# Altium PCB PCB.PcbDoc
Units mil, origin at the board's own origin, x right, y up, seen from the top; angles counter-clockwise.
Board outline 1968.5 x 2411.42 mil, 2 copper layers (Top Layer, Bottom Layer); 85 components, 64 nets, 316 pads, 99 vias.
Unrouted connection lines stored in the file: 27.
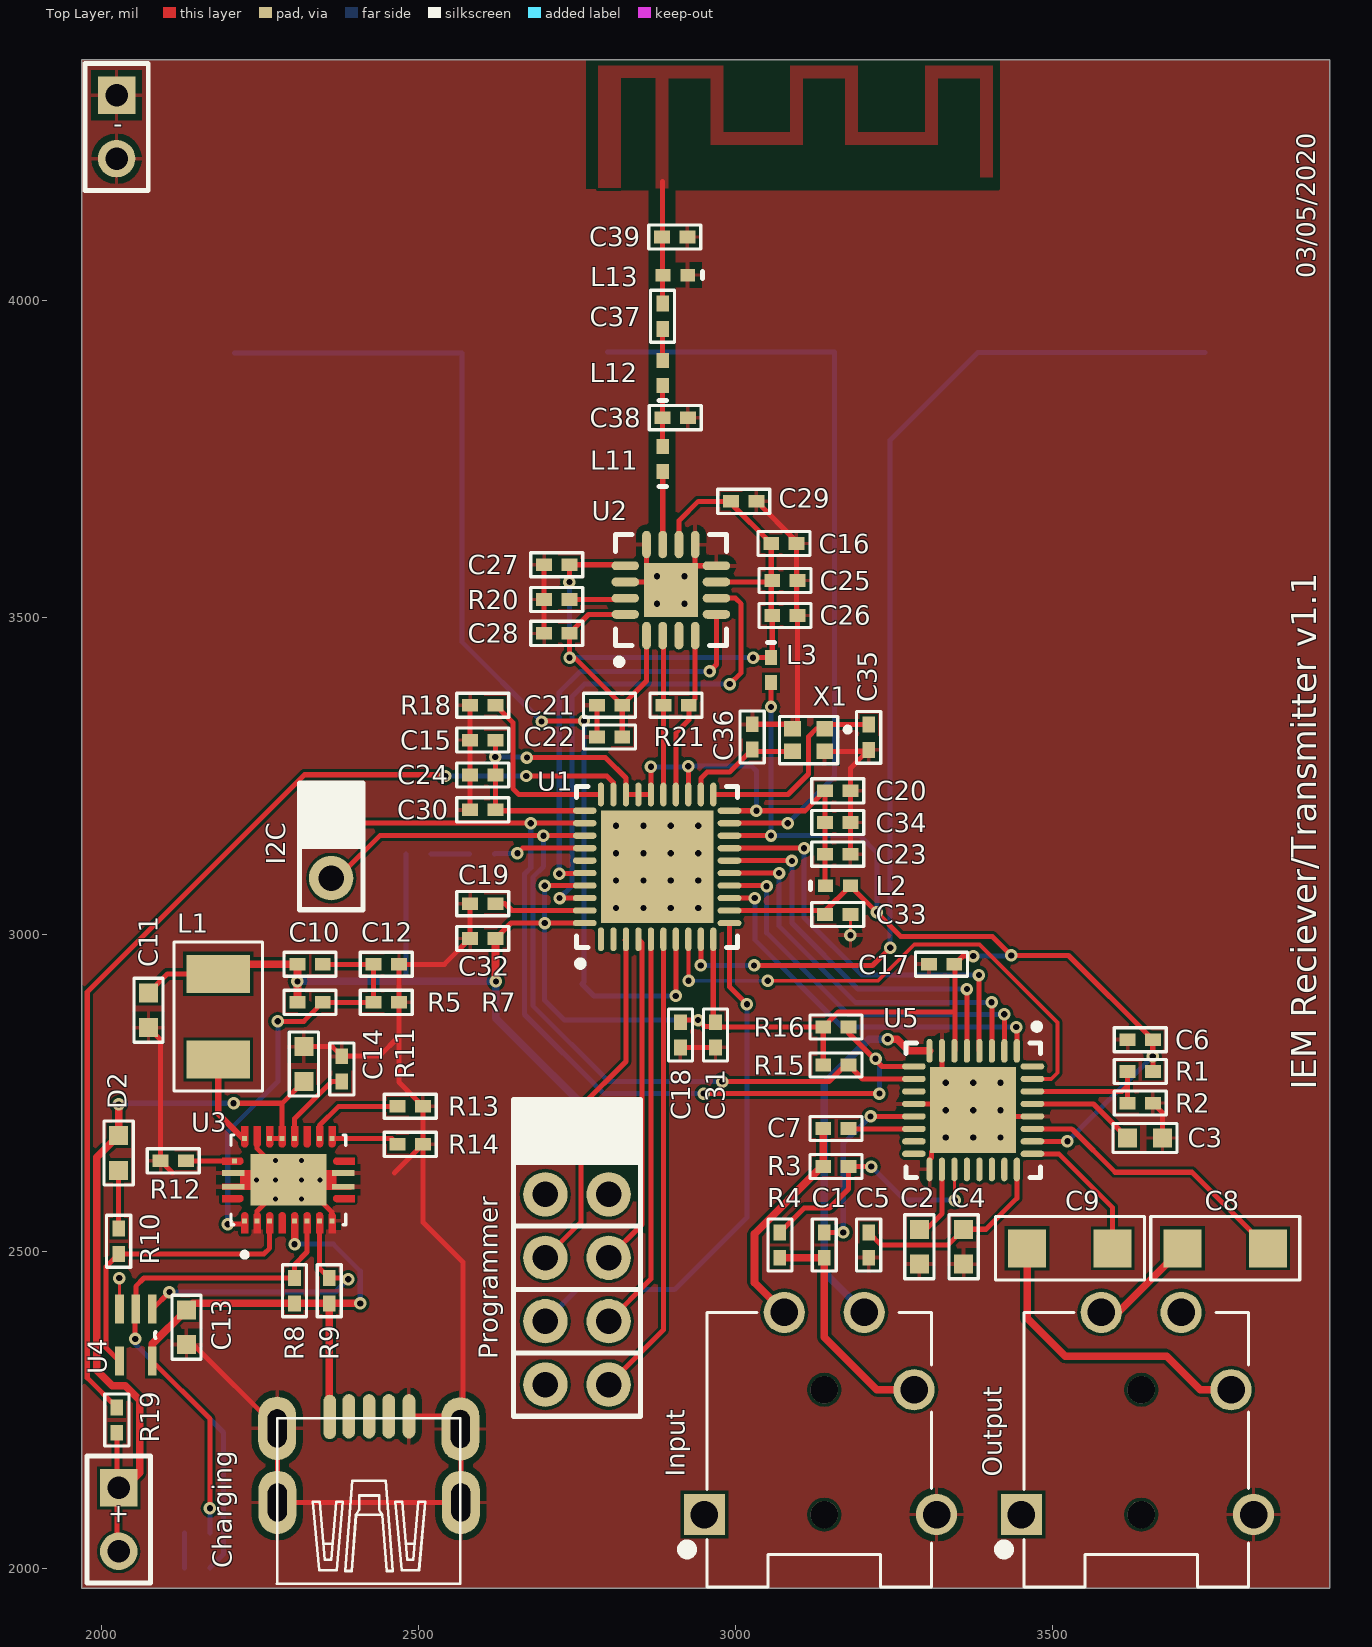
[diagram p0: Top Layer view]
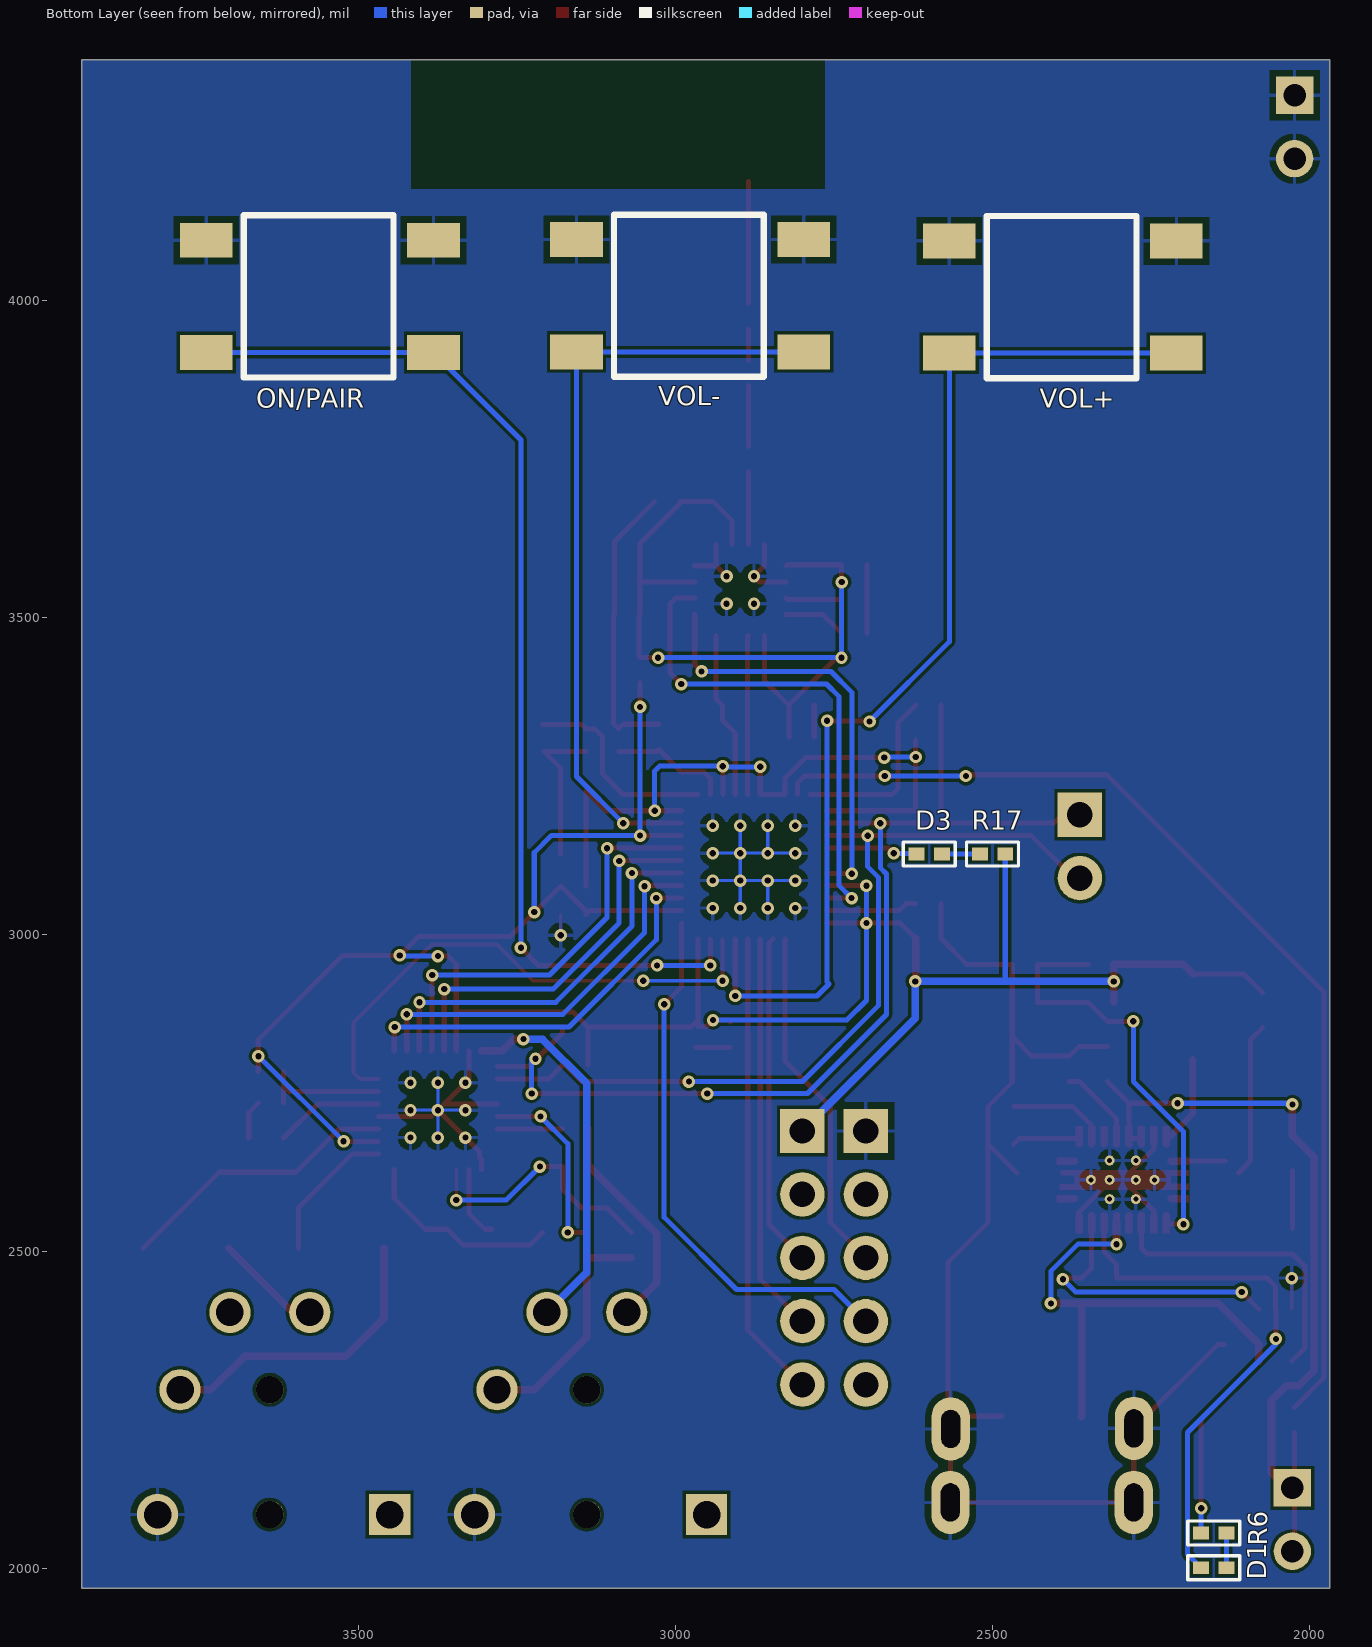
[diagram p1: Bottom Layer view, seen from below]

## Layer stack, top to bottom
Top Solder: solder mask 0.4, Solder Resist, Dk 3.5
Top Layer: signal copper 1.4
Dielectric 1: dielectric 12.6, FR-4, Dk 4.8
Bottom Layer: signal copper 1.4
Bottom Solder: solder mask 0.4, Solder Resist, Dk 3.5

## Board outline
1968.5,1968.5 1968.5,4379.92 3937.01,4379.92 3937.01,1968.5

## Design rules (kind name [scope] priority, off if disabled: settings)
Clearance [All] p1: gap=4.92 ignorepadtopadclearanceinfootprint=FALSE except(0: Arc-Hole Track-Hole SMDPad-Hole THPad-Hole Via-Hole Fill-Hole Poly-Hole Region-Hole Text-Hole)
DiffPairsRouting [All] p1: maxlimit=393.7 minlimit=4.92 mostfreqgap=5.91 toplayer_minwidth=15 toplayer_maxwidth=15 toplayer_prefwidth=15 bottomlayer_minwidth=15 bottomlayer_maxwidth=15 bottomlayer_prefwidth=15 maxuncoupledlength=500
FabricationTestPointUsage FabricationTestPointUsage_1 [All] p1: valid=0 allowmultiple=FALSE
FabricationTestpoint FabricationTestpoint_1 [All] p1: side=3 testpointundercomponent=TRUE minsize=40 maxsize=100 preferedsize=60 minholesize=0 maxholesize=40 preferedholesize=32 testpointgrid=1 allowsidetop=TRUE allowsidebottom=TRUE usegrid=TRUE gridtolerance=0.01
HoleSize [All] p1: absolutevalues=TRUE maxlimit=236.22 minlimit=7.87 maxpercent=80.000 minpercent=20.000
HoleSize FabricationTestpoint [All] p2 off: absolutevalues=TRUE maxlimit=100 minlimit=1 maxpercent=80.000 minpercent=20.000
HoleSize FabricationTestPointUsage [All] p3 off: absolutevalues=TRUE maxlimit=100 minlimit=1 maxpercent=80.000 minpercent=20.000
MinimumSolderMaskSliver [All] p1: minsoldermaskwidth=2.76
MinimumSolderMaskSliver SilkscreenOverComponentPads [All] p2: minsoldermaskwidth=10
PlaneClearance [All] p1: clearance=19.68
PlaneConnect [All] p1: planeconnectstyle=Relief reliefexpansion=15.75 reliefentries=4 reliefconductorwidth=5.91 reliefairgap=5.91
PolygonConnect [All] p1: connectstyle=Relief reliefconductorwidth=5.91 reliefentries=4 polygonreliefangle="90 Angle" airgapwidth=10
RoomDefinition Receiver [InComponentClass('Receiver')] p1: confinementstyle=ConfineIn formatcopy=TRUE lockcomponents=FALSE outline 0,0 2000,0 2000,1000 0,1000
RoomDefinition Power_Supply [InComponentClass('Power_Supply')] p2: confinementstyle=ConfineIn formatcopy=TRUE lockcomponents=FALSE outline 0,0 2000,0 2000,1000 0,1000
RoomDefinition DAC [InComponentClass('DAC')] p3: confinementstyle=ConfineIn formatcopy=TRUE lockcomponents=FALSE outline 0,0 2000,0 2000,1000 0,1000
RoutingCorners [All] p1: cornerstyle=45-Degree minsetback=49.21 maxsetback=49.21
RoutingVias [All] p1: holewidth=11.81 width=23.62 viastyle="Through Hole" minholewidth=7.87 minwidth=17.72 maxholewidth=17.72 maxwidth=29.53
SolderMaskExpansion [All] p1: expansion=1.18
Width [All] p1: maxlimit=393.7 minlimit=4.92 preferedwidth=5.91
22 further rules are at their usual default settings.

## Classes and differential pairs
component class Receiver: C15 C16 C17 C18 C19 C20 C21 C22 C23 C24 C25 C26 C27 C28 C29 C30 C31 C32 C33 C34 C35 C36 C37 C38 C39 D3 I2C L2 L3 L11 L12 L13 ON/PAIR Programmer R15 R16 R17 R18 R19 R20 R21 U1 U2 VOL+ VOL- X1
component class Power_Supply: + - C10 C11 C12 C13 C14 Charging D1 D2 L1 R5 R6 R7 R8 R9 R10 R11 R12 R13 R14 U3 U4
component class DAC: C1 C2 C3 C4 C5 C6 C7 C8 C9 Input R1 R2 R3 R4 U5

## Components (designator, comment, footprint, x,y, rotation, side; value= is the part's Value field where it differs from the comment)
+ "BATTERY+" HDR1X2 2027,2127 r270 top (schematic designator P1)
- "BATTERY-" HDR1X2 2023.62,4323.82 r270 top (schematic designator P3)
C1 "1u" 0402C-TBD 3140,2490 r90 top
C2 "10u" 0603C-GENERIC 3290,2535 r270 top
C3 "10u" 0603C-GENERIC 3618.4,2679 r0 top
C4 "10u" 0603C-GENERIC 3360,2535 r270 top
C5 "1u" 0402C-TBD 3210,2530 r270 top
C6 "2u2" 0402C-TBD 3658.4,2834 r180 top
C7 "1u" 0402C-TBD 3178.4,2694 r180 top
C8 "47u" 1206C-GENERIC 3840,2505 r180 top
C9 "47u" 1206C-GENERIC 3595,2505 r180 top
C10 "33p" 0402C-TBD 2309,2953 r0 top
C11 "10uF" 0603C-GENERIC 2074,2908 r270 top
C12 "220p" 0402C-TBD 2429,2953 r0 top
C13 "10uF" 0603C-GENERIC 2134,2408 r270 top
C14 "10uF" 0603C-GENERIC 2319,2768 r90 top
C15 "2u2" 0402C-TBD 2621.35,3306.65 r180 top
C16 "2u2" 0402C-TBD 3056.35,3616.65 r0 top
C17 "100n" 0402C-TBD 3305,2953 r0 top
C18 "1u" 0402C-TBD 2913.35,2861.65 r270 top
C19 "1u" 0402C-TBD 2581.35,3048.65 r0 top
C20 "100n" 0402C-TBD 3141.35,3226.65 r0 top
C21 "18p" 0402C-TBD 2821.35,3361.65 r180 top
C22 "1n" 0402C-TBD 2821.35,3311.65 r180 top
C23 "100n" 0402C-TBD 3181.35,3126.65 r180 top
C24 "220p" 0402C-TBD 2581.35,3251.65 r0 top
C25 "1n" 0402C-TBD 3058,3558.31 r0 top
C26 "18p" 0402C-TBD 3058,3503.31 r0 top
C27 "1n" 0402C-TBD 2738,3583.31 r180 top
C28 "18p" 0402C-TBD 2738,3475 r180 top
C29 "1n" 0402C-TBD 2993,3683.31 r0 top
C30 "100n" 0402C-TBD 2621.35,3196.65 r180 top
C31 "100n" 0402C-TBD 2968.35,2861.65 r270 top
C32 "100n" 0402C-TBD 2621.35,2993.65 r180 top
C33 "100n" 0402C-TBD 3141.35,3031.65 r0 top
C34 "100n" 0402C-TBD 3141.35,3176.65 r0 top
C35 "33p" 0402C-TBD 3210,3331 r270 top
C36 "33p" 0402C-TBD 3026.35,3291.65 r90 top
C37 "1n" 0402C-TBD 2885,3955.31 r90 top
C38 "1n" 0402C-TBD 2885,3815.31 r0 top
C39 "1n" 0402C-TBD 2884.21,4100.39 r0 top
Charging "USB" USB-MINI-B-51387-0571 2360,2239 r90 top (schematic designator K1)
D1 "LED2" 0402C-GENERIC 2131,2001 r0 bottom
D2 "DIODE-GENERIC" 0603C-GENERIC 2027,2683 r270 top
D3 "LED2" 0402C-GENERIC 2580,3127 r0 bottom
I2C "I2C" HEADER-1X2 2362.2,3188.98 r0 top (schematic designator P2)
Input "SJ1-43515TS" CUI_SJ-43515TS 3140,2187.36 r90 top (schematic designator J1)
L1 "Inductor" 1210C-GENERIC 2184,2803 r90 top value=6n8
L2 "Inductor" 0402-A 3161.35,3076.65 r0 top value=102
L3 "Inductor" 0402-A 3056,3417 r270 top value=102
L11 "Inductor" 0402-A 2885,3750.31 r90 top value=6n8
L12 "Inductor" 0402-A 2885,3885.62 r90 top value=6n8
L13 "Inductor" 0402-A 2905,4040.31 r180 top value=6n8
ON/PAIR "FSM2JSMAATR" "Tactile Button" 3740.27,4095.17 r270 bottom
Output "SJ1-43515TS" CUI_SJ-43515TS 3640,2187.36 r90 top (schematic designator J2)
Programmer "Programm" HEADER-2X5 2700,2690 r0 top (schematic designator P4)
R1 "DNM" 0402R-GENERIC 3618.4,2784 r0 top
R2 "0R" 0402R-GENERIC 3658.4,2734 r180 top
R3 "2k2" 0402R-GENERIC 3178.4,2634 r180 top
R4 "2k2" 0402R-GENERIC 3070,2530 r270 top
R5 "330K" 0402R-GENERIC 2309,2893 r0 top
R6 "270R" 0402R-GENERIC 2171,2056 r180 bottom
R7 "100K" 0402R-GENERIC 2429,2893 r0 top
R8 "10k" 0402R-GENERIC 2304.2,2418.04 r90 top
R9 "10k" 0402R-GENERIC 2359.2,2418.04 r90 top
R10 "10k" 0402R-GENERIC 2027,2496 r90 top
R11 "10k" 0402R-GENERIC 2379,2768 r90 top
R12 "0R" 0402R-GENERIC 2133,2643 r180 top
R13 "0R" 0402R-GENERIC 2467,2729 r0 top
R14 "2k2" 0402R-GENERIC 2467,2669 r0 top
R15 "2k2" 0402R-GENERIC 3138.4,2794 r0 top
R16 "2k2" 0402R-GENERIC 3138.4,2854 r0 top
R17 "270R" 0402R-GENERIC 2480,3127 r0 bottom
R18 "56k" 0402R-GENERIC 2581.35,3361.65 r0 top
R19 "47k" 0402R-GENERIC 2024,2254 r270 top
R20 "4k3" 0402R-GENERIC 2738,3528.31 r180 top
R21 "??" 0402R-GENERIC 2926.35,3361.65 r180 top
U1 "CC85xx" QFN40 2876.35,3106.65 r90 top
U2 "CC2590" QFN16 2898,3543.31 r90 top
U3 "BQ25015" *CONV_BQ25015RHLT_BQ25015RHLT(Primary) 2294.67,2613 r90 top
U4 "SN74AHC1G32DCKR" *SOT65P210X110-5N 2054,2368 r270 top
U5 "TLV320AIC3204" QFN32 3374.9,2722.9 r270 top
VOL+ "FSM2JSMAATR" "Tactile Button" 2568.27,4094.16 r270 bottom (schematic designator VOL-)
VOL- "FSM2JSMAATR" "Tactile Button" 3156.27,4096.16 r270 bottom (schematic designator VOL+)
X1 "Component_1" *XTALDFN200X160X70-4N 3115.35,3306.65 r180 top

## Footprints (in the part's own frame and the unit in brackets; to place one, negate y for a bottom-side part, rotate by r counter-clockwise, add the part's x,y. Pads: shape width x height; smd on the part's side, far side on the other; paste and mask are expansions set on the pad)
0402-A [mm] "Chip Inductor, Body 1.0x0.5mm, IPC High Density"
  rect 0.6x0.5 smd: 1(-0.5,0) 2(0.5,0)
  silkscreen extent -1.1,-0.15 -1.1,0.15, body extent -0.55,-0.3 0.55,0.3, height 0.55
0402C-GENERIC [mil]
  rect 25x20 smd: 1(0,0) 2(40,0)
  silkscreen extent -21,-19 61,19
0402C-TBD [mil]
  rect 25x20 smd: 1(0,0) 2(40,0)
  silkscreen extent -21,-19 61,19, body extent 2,-9 39,9, height 19
0402R-GENERIC [mil]
  rect 25x20 smd: 1(0,0) 2(40,0)
  silkscreen extent -21,-19 61,19, body extent -6,-10 46,10, height 14
0603C-GENERIC [mil] "CAPACITOR 0603"
  rect 30x30 smd: 1(0,0) 2(55,0)
  silkscreen extent -23,-23 78,23, body extent -4,-15 59,15, height 19
1206C-GENERIC [mil]
  rect 60x60 smd: 1(0,0) 2(135,0)
  silkscreen extent -50,-50 185,50, body extent -8,-29 147,29, height 46
1210C-GENERIC [mil]
  rect 60x100 smd: 1(0,0) 2(135,0)
  silkscreen extent -50,-70 185,70, body extent -10,-50 145,50, height 46
*CONV_BQ25015RHLT_BQ25015RHLT(Primary) [mm]
  rect 0.2x0.2 smd: 2(-1.65,1.75) 3(-1.65,1.25) 4(-1.65,0.75) 6(-1.65,-0.25) 7(-1.65,-0.75) 8(-1.65,-1.25) 9(-1.65,-1.75) 12(1.65,-1.75) 13(1.65,-1.25) 15(1.65,-0.25) 16(1.65,0.25) 17(1.65,0.75) 19(1.65,1.75) 20(0.75,2.15)
  rect 2.05x3.05 smd: 21(0,0)
  rect 0.23x0.9 smd: 21_1(-0.275,2.2) 21_2(0.275,2.2) 21_3(0.275,-2.2) 21_4(-0.275,-2.2)
  round 0.4 hole 0.2: 21_5(0,1.275) 21_6(-0.775,0.525) 21_7(0,0.525) 21_8(0.775,0.525) 21_9(0,-1.275) 21_10(0.775,-0.525) 21_11(0,-0.525) 21_12(-0.775,-0.525)
  Top Layer region: -0.39,2.65 -0.16,2.65 -0.16,1.925 0.16,1.925 0.16,2.65 0.39,2.65 0.39,-2.49 0.175,-2.49 0.175,-1.925 -0.17,-1.925 -0.17,-2.515 -0.39,-2.515
  Top Layer region: 0.89,-2.65 0.89,-1.94 0.89,-1.933 0.889,-1.925 0.888,-1.918 0.887,-1.911 0.885,-1.904 0.883,-1.897 0.881,-1.89 0.878,-1.883 0.875,-1.876 0.871,-1.87 0.867,-1.864 0.863,-1.858 0.859,-1.852 0.854,-1.846 0.849,-1.841 0.844,-1.836 0.838,-1.831 0.832,-1.827 0.826,-1.823 0.82,-1.819 0.814,-1.815 0.807,-1.812 0.8,-1.809 0.793,-1.807 0.786,-1.805 0.779,-1.803 0.772,-1.802 0.765,-1.801 0.757,-1.8 0.75,-1.8 0.743,-1.8 0.735,-1.801 0.728,-1.802 0.721,-1.803 0.714,-1.805 0.707,-1.807 0.7,-1.809 0.693,-1.812 0.686,-1.815 0.68,-1.819 0.674,-1.823 0.668,-1.827 0.662,-1.831 0.656,-1.836 0.651,-1.841 0.646,-1.846 0.641,-1.852 0.637,-1.858 0.633,-1.864 0.629,-1.87 0.625,-1.876 0.622,-1.883 0.619,-1.89 0.617,-1.897 0.615,-1.904 0.613,-1.911 0.612,-1.918 0.611,-1.925 0.61,-1.933 0.61,-1.94 0.61,-2.65
  Top Layer region: -0.61,-2.65 -0.61,-1.94 -0.61,-1.933 -0.611,-1.925 -0.612,-1.918 -0.613,-1.911 -0.615,-1.904 -0.617,-1.897 -0.619,-1.89 -0.622,-1.883 -0.625,-1.876 -0.629,-1.87 -0.633,-1.864 -0.637,-1.858 -0.641,-1.852 -0.646,-1.846 -0.651,-1.841 -0.656,-1.836 -0.662,-1.831 -0.668,-1.827 -0.674,-1.823 -0.68,-1.819 -0.686,-1.815 -0.693,-1.812 -0.7,-1.809 -0.707,-1.807 -0.714,-1.805 -0.721,-1.803 -0.728,-1.802 -0.735,-1.801 -0.743,-1.8 -0.75,-1.8 -0.757,-1.8 -0.765,-1.801 -0.772,-1.802 -0.779,-1.803 -0.786,-1.805 -0.793,-1.807 -0.8,-1.809 -0.807,-1.812 -0.814,-1.815 -0.82,-1.819 -0.826,-1.823 -0.832,-1.827 -0.838,-1.831 -0.844,-1.836 -0.849,-1.841 -0.854,-1.846 -0.859,-1.852 -0.863,-1.858 -0.867,-1.864 -0.871,-1.87 -0.875,-1.876 -0.878,-1.883 -0.881,-1.89 -0.883,-1.897 -0.885,-1.904 -0.887,-1.911 -0.888,-1.918 -0.889,-1.925 -0.89,-1.933 -0.89,-1.94 -0.89,-2.65
  Top Layer region: -0.89,2.65 -0.89,1.94 -0.89,1.933 -0.889,1.925 -0.888,1.918 -0.887,1.911 -0.885,1.904 -0.883,1.897 -0.881,1.89 -0.878,1.883 -0.875,1.876 -0.871,1.87 -0.867,1.864 -0.863,1.858 -0.859,1.852 -0.854,1.846 -0.849,1.841 -0.844,1.836 -0.838,1.831 -0.832,1.827 -0.826,1.823 -0.82,1.819 -0.814,1.815 -0.807,1.812 -0.8,1.809 -0.793,1.807 -0.786,1.805 -0.779,1.803 -0.772,1.802 -0.765,1.801 -0.757,1.8 -0.75,1.8 -0.743,1.8 -0.735,1.801 -0.728,1.802 -0.721,1.803 -0.714,1.805 -0.707,1.807 -0.7,1.809 -0.693,1.812 -0.686,1.815 -0.68,1.819 -0.674,1.823 -0.668,1.827 -0.662,1.831 -0.656,1.836 -0.651,1.841 -0.646,1.846 -0.641,1.852 -0.637,1.858 -0.633,1.864 -0.629,1.87 -0.625,1.876 -0.622,1.883 -0.619,1.89 -0.617,1.897 -0.615,1.904 -0.613,1.911 -0.612,1.918 -0.611,1.925 -0.61,1.933 -0.61,1.94 -0.61,2.65
  Top Layer region: 0.61,2.65 0.61,1.94 0.61,1.933 0.611,1.925 0.612,1.918 0.613,1.911 0.615,1.904 0.617,1.897 0.619,1.89 0.622,1.883 0.625,1.876 0.629,1.87 0.633,1.864 0.637,1.858 0.641,1.852 0.646,1.846 0.651,1.841 0.656,1.836 0.662,1.831 0.668,1.827 0.674,1.823 0.68,1.819 0.686,1.815 0.693,1.812 0.7,1.809 0.707,1.807 0.714,1.805 0.721,1.803 0.728,1.802 0.735,1.801 0.743,1.8 0.75,1.8 0.757,1.8 0.765,1.801 0.772,1.802 0.779,1.803 0.786,1.805 0.793,1.807 0.8,1.809 0.807,1.812 0.814,1.815 0.82,1.819 0.826,1.823 0.832,1.827 0.838,1.831 0.844,1.836 0.849,1.841 0.854,1.846 0.859,1.852 0.863,1.858 0.867,1.864 0.871,1.87 0.875,1.876 0.878,1.883 0.881,1.89 0.883,1.897 0.885,1.904 0.887,1.911 0.888,1.918 0.889,1.925 0.89,1.933 0.89,1.94 0.89,2.65
  Top Layer region: 2.15,1.89 1.44,1.89 1.433,1.89 1.425,1.889 1.418,1.888 1.411,1.887 1.404,1.885 1.397,1.883 1.39,1.881 1.383,1.878 1.376,1.875 1.37,1.871 1.364,1.867 1.358,1.863 1.352,1.859 1.346,1.854 1.341,1.849 1.336,1.844 1.331,1.838 1.327,1.832 1.323,1.826 1.319,1.82 1.315,1.814 1.312,1.807 1.309,1.8 1.307,1.793 1.305,1.786 1.303,1.779 1.302,1.772 1.301,1.765 1.3,1.757 1.3,1.75 1.3,1.743 1.301,1.735 1.302,1.728 1.303,1.721 1.305,1.714 1.307,1.707 1.309,1.7 1.312,1.693 1.315,1.686 1.319,1.68 1.323,1.674 1.327,1.668 1.331,1.662 1.336,1.656 1.341,1.651 1.346,1.646 1.352,1.641 1.358,1.637 1.364,1.633 1.37,1.629 1.376,1.625 1.383,1.622 1.39,1.619 1.397,1.617 1.404,1.615 1.411,1.613 1.418,1.612 1.425,1.611 1.433,1.61 1.44,1.61 2.15,1.61
  Top Layer region: 2.15,1.39 1.44,1.39 1.433,1.39 1.425,1.389 1.418,1.388 1.411,1.387 1.404,1.385 1.397,1.383 1.39,1.381 1.383,1.378 1.376,1.375 1.37,1.371 1.364,1.367 1.358,1.363 1.352,1.359 1.346,1.354 1.341,1.349 1.336,1.344 1.331,1.338 1.327,1.332 1.323,1.326 1.319,1.32 1.315,1.314 1.312,1.307 1.309,1.3 1.307,1.293 1.305,1.286 1.303,1.279 1.302,1.272 1.301,1.265 1.3,1.257 1.3,1.25 1.3,1.243 1.301,1.235 1.302,1.228 1.303,1.221 1.305,1.214 1.307,1.207 1.309,1.2 1.312,1.193 1.315,1.186 1.319,1.18 1.323,1.174 1.327,1.168 1.331,1.162 1.336,1.156 1.341,1.151 1.346,1.146 1.352,1.141 1.358,1.137 1.364,1.133 1.37,1.129 1.376,1.125 1.383,1.122 1.39,1.119 1.397,1.117 1.404,1.115 1.411,1.113 1.418,1.112 1.425,1.111 1.433,1.11 1.44,1.11 2.15,1.11
  Top Layer region: 2.15,0.89 1.44,0.89 1.433,0.89 1.425,0.889 1.418,0.888 1.411,0.887 1.404,0.885 1.397,0.883 1.39,0.881 1.383,0.878 1.376,0.875 1.37,0.871 1.364,0.867 1.358,0.863 1.352,0.859 1.346,0.854 1.341,0.849 1.336,0.844 1.331,0.838 1.327,0.832 1.323,0.826 1.319,0.82 1.315,0.814 1.312,0.807 1.309,0.8 1.307,0.793 1.305,0.786 1.303,0.779 1.302,0.772 1.301,0.765 1.3,0.757 1.3,0.75 1.3,0.743 1.301,0.735 1.302,0.728 1.303,0.721 1.305,0.714 1.307,0.707 1.309,0.7 1.312,0.693 1.315,0.686 1.319,0.68 1.323,0.674 1.327,0.668 1.331,0.662 1.336,0.656 1.341,0.651 1.346,0.646 1.352,0.641 1.358,0.637 1.364,0.633 1.37,0.629 1.376,0.625 1.383,0.622 1.39,0.619 1.397,0.617 1.404,0.615 1.411,0.613 1.418,0.612 1.425,0.611 1.433,0.61 1.44,0.61 2.15,0.61
  Top Layer region: 2.15,0.39 1.44,0.39 1.433,0.39 1.425,0.389 1.418,0.388 1.411,0.387 1.404,0.385 1.397,0.383 1.39,0.381 1.383,0.378 1.376,0.375 1.37,0.371 1.364,0.367 1.358,0.363 1.352,0.359 1.346,0.354 1.341,0.349 1.336,0.344 1.331,0.338 1.327,0.332 1.323,0.326 1.319,0.32 1.315,0.314 1.312,0.307 1.309,0.3 1.307,0.293 1.305,0.286 1.303,0.279 1.302,0.272 1.301,0.265 1.3,0.257 1.3,0.25 1.3,0.243 1.301,0.235 1.302,0.228 1.303,0.221 1.305,0.214 1.307,0.207 1.309,0.2 1.312,0.193 1.315,0.186 1.319,0.18 1.323,0.174 1.327,0.168 1.331,0.162 1.336,0.156 1.341,0.151 1.346,0.146 1.352,0.141 1.358,0.137 1.364,0.133 1.37,0.129 1.376,0.125 1.383,0.122 1.39,0.119 1.397,0.117 1.404,0.115 1.411,0.113 1.418,0.112 1.425,0.111 1.433,0.11 1.44,0.11 2.15,0.11
  Top Layer region: 2.15,-0.11 1.44,-0.11 1.433,-0.11 1.425,-0.111 1.418,-0.112 1.411,-0.113 1.404,-0.115 1.397,-0.117 1.39,-0.119 1.383,-0.122 1.376,-0.125 1.37,-0.129 1.364,-0.133 1.358,-0.137 1.352,-0.141 1.346,-0.146 1.341,-0.151 1.336,-0.156 1.331,-0.162 1.327,-0.168 1.323,-0.174 1.319,-0.18 1.315,-0.186 1.312,-0.193 1.309,-0.2 1.307,-0.207 1.305,-0.214 1.303,-0.221 1.302,-0.228 1.301,-0.235 1.3,-0.243 1.3,-0.25 1.3,-0.257 1.301,-0.265 1.302,-0.272 1.303,-0.279 1.305,-0.286 1.307,-0.293 1.309,-0.3 1.312,-0.307 1.315,-0.314 1.319,-0.32 1.323,-0.326 1.327,-0.332 1.331,-0.338 1.336,-0.344 1.341,-0.349 1.346,-0.354 1.352,-0.359 1.358,-0.363 1.364,-0.367 1.37,-0.371 1.376,-0.375 1.383,-0.378 1.39,-0.381 1.397,-0.383 1.404,-0.385 1.411,-0.387 1.418,-0.388 1.425,-0.389 1.433,-0.39 1.44,-0.39 2.15,-0.39
  Top Layer region: 2.15,-0.61 1.44,-0.61 1.433,-0.61 1.425,-0.611 1.418,-0.612 1.411,-0.613 1.404,-0.615 1.397,-0.617 1.39,-0.619 1.383,-0.622 1.376,-0.625 1.37,-0.629 1.364,-0.633 1.358,-0.637 1.352,-0.641 1.346,-0.646 1.341,-0.651 1.336,-0.656 1.331,-0.662 1.327,-0.668 1.323,-0.674 1.319,-0.68 1.315,-0.686 1.312,-0.693 1.309,-0.7 1.307,-0.707 1.305,-0.714 1.303,-0.721 1.302,-0.728 1.301,-0.735 1.3,-0.743 1.3,-0.75 1.3,-0.757 1.301,-0.765 1.302,-0.772 1.303,-0.779 1.305,-0.786 1.307,-0.793 1.309,-0.8 1.312,-0.807 1.315,-0.814 1.319,-0.82 1.323,-0.826 1.327,-0.832 1.331,-0.838 1.336,-0.844 1.341,-0.849 1.346,-0.854 1.352,-0.859 1.358,-0.863 1.364,-0.867 1.37,-0.871 1.376,-0.875 1.383,-0.878 1.39,-0.881 1.397,-0.883 1.404,-0.885 1.411,-0.887 1.418,-0.888 1.425,-0.889 1.433,-0.89 1.44,-0.89 2.15,-0.89
  Top Layer region: 2.15,-1.11 1.44,-1.11 1.433,-1.11 1.425,-1.111 1.418,-1.112 1.411,-1.113 1.404,-1.115 1.397,-1.117 1.39,-1.119 1.383,-1.122 1.376,-1.125 1.37,-1.129 1.364,-1.133 1.358,-1.137 1.352,-1.141 1.346,-1.146 1.341,-1.151 1.336,-1.156 1.331,-1.162 1.327,-1.168 1.323,-1.174 1.319,-1.18 1.315,-1.186 1.312,-1.193 1.309,-1.2 1.307,-1.207 1.305,-1.214 1.303,-1.221 1.302,-1.228 1.301,-1.235 1.3,-1.243 1.3,-1.25 1.3,-1.257 1.301,-1.265 1.302,-1.272 1.303,-1.279 1.305,-1.286 1.307,-1.293 1.309,-1.3 1.312,-1.307 1.315,-1.314 1.319,-1.32 1.323,-1.326 1.327,-1.332 1.331,-1.338 1.336,-1.344 1.341,-1.349 1.346,-1.354 1.352,-1.359 1.358,-1.363 1.364,-1.367 1.37,-1.371 1.376,-1.375 1.383,-1.378 1.39,-1.381 1.397,-1.383 1.404,-1.385 1.411,-1.387 1.418,-1.388 1.425,-1.389 1.433,-1.39 1.44,-1.39 2.15,-1.39
  Top Layer region: 2.15,-1.61 1.44,-1.61 1.433,-1.61 1.425,-1.611 1.418,-1.612 1.411,-1.613 1.404,-1.615 1.397,-1.617 1.39,-1.619 1.383,-1.622 1.376,-1.625 1.37,-1.629 1.364,-1.633 1.358,-1.637 1.352,-1.641 1.346,-1.646 1.341,-1.651 1.336,-1.656 1.331,-1.662 1.327,-1.668 1.323,-1.674 1.319,-1.68 1.315,-1.686 1.312,-1.693 1.309,-1.7 1.307,-1.707 1.305,-1.714 1.303,-1.721 1.302,-1.728 1.301,-1.735 1.3,-1.743 1.3,-1.75 1.3,-1.757 1.301,-1.765 1.302,-1.772 1.303,-1.779 1.305,-1.786 1.307,-1.793 1.309,-1.8 1.312,-1.807 1.315,-1.814 1.319,-1.82 1.323,-1.826 1.327,-1.832 1.331,-1.838 1.336,-1.844 1.341,-1.849 1.346,-1.854 1.352,-1.859 1.358,-1.863 1.364,-1.867 1.37,-1.871 1.376,-1.875 1.383,-1.878 1.39,-1.881 1.397,-1.883 1.404,-1.885 1.411,-1.887 1.418,-1.888 1.425,-1.889 1.433,-1.89 1.44,-1.89 2.15,-1.89
  Top Layer region: -2.15,-1.89 -1.44,-1.89 -1.433,-1.89 -1.425,-1.889 -1.418,-1.888 -1.411,-1.887 -1.404,-1.885 -1.397,-1.883 -1.39,-1.881 -1.383,-1.878 -1.376,-1.875 -1.37,-1.871 -1.364,-1.867 -1.358,-1.863 -1.352,-1.859 -1.346,-1.854 -1.341,-1.849 -1.336,-1.844 -1.331,-1.838 -1.327,-1.832 -1.323,-1.826 -1.319,-1.82 -1.315,-1.814 -1.312,-1.807 -1.309,-1.8 -1.307,-1.793 -1.305,-1.786 -1.303,-1.779 -1.302,-1.772 -1.301,-1.765 -1.3,-1.757 -1.3,-1.75 -1.3,-1.743 -1.301,-1.735 -1.302,-1.728 -1.303,-1.721 -1.305,-1.714 -1.307,-1.707 -1.309,-1.7 -1.312,-1.693 -1.315,-1.686 -1.319,-1.68 -1.323,-1.674 -1.327,-1.668 -1.331,-1.662 -1.336,-1.656 -1.341,-1.651 -1.346,-1.646 -1.352,-1.641 -1.358,-1.637 -1.364,-1.633 -1.37,-1.629 -1.376,-1.625 -1.383,-1.622 -1.39,-1.619 -1.397,-1.617 -1.404,-1.615 -1.411,-1.613 -1.418,-1.612 -1.425,-1.611 -1.433,-1.61 -1.44,-1.61 -2.15,-1.61
  Top Layer region: -2.15,-1.39 -1.44,-1.39 -1.433,-1.39 -1.425,-1.389 -1.418,-1.388 -1.411,-1.387 -1.404,-1.385 -1.397,-1.383 -1.39,-1.381 -1.383,-1.378 -1.376,-1.375 -1.37,-1.371 -1.364,-1.367 -1.358,-1.363 -1.352,-1.359 -1.346,-1.354 -1.341,-1.349 -1.336,-1.344 -1.331,-1.338 -1.327,-1.332 -1.323,-1.326 -1.319,-1.32 -1.315,-1.314 -1.312,-1.307 -1.309,-1.3 -1.307,-1.293 -1.305,-1.286 -1.303,-1.279 -1.302,-1.272 -1.301,-1.265 -1.3,-1.257 -1.3,-1.25 -1.3,-1.243 -1.301,-1.235 -1.302,-1.228 -1.303,-1.221 -1.305,-1.214 -1.307,-1.207 -1.309,-1.2 -1.312,-1.193 -1.315,-1.186 -1.319,-1.18 -1.323,-1.174 -1.327,-1.168 -1.331,-1.162 -1.336,-1.156 -1.341,-1.151 -1.346,-1.146 -1.352,-1.141 -1.358,-1.137 -1.364,-1.133 -1.37,-1.129 -1.376,-1.125 -1.383,-1.122 -1.39,-1.119 -1.397,-1.117 -1.404,-1.115 -1.411,-1.113 -1.418,-1.112 -1.425,-1.111 -1.433,-1.11 -1.44,-1.11 -2.15,-1.11
  Top Layer region: -2.15,-0.89 -1.44,-0.89 -1.433,-0.89 -1.425,-0.889 -1.418,-0.888 -1.411,-0.887 -1.404,-0.885 -1.397,-0.883 -1.39,-0.881 -1.383,-0.878 -1.376,-0.875 -1.37,-0.871 -1.364,-0.867 -1.358,-0.863 -1.352,-0.859 -1.346,-0.854 -1.341,-0.849 -1.336,-0.844 -1.331,-0.838 -1.327,-0.832 -1.323,-0.826 -1.319,-0.82 -1.315,-0.814 -1.312,-0.807 -1.309,-0.8 -1.307,-0.793 -1.305,-0.786 -1.303,-0.779 -1.302,-0.772 -1.301,-0.765 -1.3,-0.757 -1.3,-0.75 -1.3,-0.743 -1.301,-0.735 -1.302,-0.728 -1.303,-0.721 -1.305,-0.714 -1.307,-0.707 -1.309,-0.7 -1.312,-0.693 -1.315,-0.686 -1.319,-0.68 -1.323,-0.674 -1.327,-0.668 -1.331,-0.662 -1.336,-0.656 -1.341,-0.651 -1.346,-0.646 -1.352,-0.641 -1.358,-0.637 -1.364,-0.633 -1.37,-0.629 -1.376,-0.625 -1.383,-0.622 -1.39,-0.619 -1.397,-0.617 -1.404,-0.615 -1.411,-0.613 -1.418,-0.612 -1.425,-0.611 -1.433,-0.61 -1.44,-0.61 -2.15,-0.61
  Top Layer region: -2.15,-0.39 -1.44,-0.39 -1.433,-0.39 -1.425,-0.389 -1.418,-0.388 -1.411,-0.387 -1.404,-0.385 -1.397,-0.383 -1.39,-0.381 -1.383,-0.378 -1.376,-0.375 -1.37,-0.371 -1.364,-0.367 -1.358,-0.363 -1.352,-0.359 -1.346,-0.354 -1.341,-0.349 -1.336,-0.344 -1.331,-0.338 -1.327,-0.332 -1.323,-0.326 -1.319,-0.32 -1.315,-0.314 -1.312,-0.307 -1.309,-0.3 -1.307,-0.293 -1.305,-0.286 -1.303,-0.279 -1.302,-0.272 -1.301,-0.265 -1.3,-0.257 -1.3,-0.25 -1.3,-0.243 -1.301,-0.235 -1.302,-0.228 -1.303,-0.221 -1.305,-0.214 -1.307,-0.207 -1.309,-0.2 -1.312,-0.193 -1.315,-0.186 -1.319,-0.18 -1.323,-0.174 -1.327,-0.168 -1.331,-0.162 -1.336,-0.156 -1.341,-0.151 -1.346,-0.146 -1.352,-0.141 -1.358,-0.137 -1.364,-0.133 -1.37,-0.129 -1.376,-0.125 -1.383,-0.122 -1.39,-0.119 -1.397,-0.117 -1.404,-0.115 -1.411,-0.113 -1.418,-0.112 -1.425,-0.111 -1.433,-0.11 -1.44,-0.11 -2.15,-0.11
  Top Layer region: -2.15,0.11 -1.44,0.11 -1.433,0.11 -1.425,0.111 -1.418,0.112 -1.411,0.113 -1.404,0.115 -1.397,0.117 -1.39,0.119 -1.383,0.122 -1.376,0.125 -1.37,0.129 -1.364,0.133 -1.358,0.137 -1.352,0.141 -1.346,0.146 -1.341,0.151 -1.336,0.156 -1.331,0.162 -1.327,0.168 -1.323,0.174 -1.319,0.18 -1.315,0.186 -1.312,0.193 -1.309,0.2 -1.307,0.207 -1.305,0.214 -1.303,0.221 -1.302,0.228 -1.301,0.235 -1.3,0.243 -1.3,0.25 -1.3,0.257 -1.301,0.265 -1.302,0.272 -1.303,0.279 -1.305,0.286 -1.307,0.293 -1.309,0.3 -1.312,0.307 -1.315,0.314 -1.319,0.32 -1.323,0.326 -1.327,0.332 -1.331,0.338 -1.336,0.344 -1.341,0.349 -1.346,0.354 -1.352,0.359 -1.358,0.363 -1.364,0.367 -1.37,0.371 -1.376,0.375 -1.383,0.378 -1.39,0.381 -1.397,0.383 -1.404,0.385 -1.411,0.387 -1.418,0.388 -1.425,0.389 -1.433,0.39 -1.44,0.39 -2.15,0.39
  Top Layer region: -2.15,0.61 -1.44,0.61 -1.433,0.61 -1.425,0.611 -1.418,0.612 -1.411,0.613 -1.404,0.615 -1.397,0.617 -1.39,0.619 -1.383,0.622 -1.376,0.625 -1.37,0.629 -1.364,0.633 -1.358,0.637 -1.352,0.641 -1.346,0.646 -1.341,0.651 -1.336,0.656 -1.331,0.662 -1.327,0.668 -1.323,0.674 -1.319,0.68 -1.315,0.686 -1.312,0.693 -1.309,0.7 -1.307,0.707 -1.305,0.714 -1.303,0.721 -1.302,0.728 -1.301,0.735 -1.3,0.743 -1.3,0.75 -1.3,0.757 -1.301,0.765 -1.302,0.772 -1.303,0.779 -1.305,0.786 -1.307,0.793 -1.309,0.8 -1.312,0.807 -1.315,0.814 -1.319,0.82 -1.323,0.826 -1.327,0.832 -1.331,0.838 -1.336,0.844 -1.341,0.849 -1.346,0.854 -1.352,0.859 -1.358,0.863 -1.364,0.867 -1.37,0.871 -1.376,0.875 -1.383,0.878 -1.39,0.881 -1.397,0.883 -1.404,0.885 -1.411,0.887 -1.418,0.888 -1.425,0.889 -1.433,0.89 -1.44,0.89 -2.15,0.89
  Top Layer region: -2.15,1.11 -1.44,1.11 -1.433,1.11 -1.425,1.111 -1.418,1.112 -1.411,1.113 -1.404,1.115 -1.397,1.117 -1.39,1.119 -1.383,1.122 -1.376,1.125 -1.37,1.129 -1.364,1.133 -1.358,1.137 -1.352,1.141 -1.346,1.146 -1.341,1.151 -1.336,1.156 -1.331,1.162 -1.327,1.168 -1.323,1.174 -1.319,1.18 -1.315,1.186 -1.312,1.193 -1.309,1.2 -1.307,1.207 -1.305,1.214 -1.303,1.221 -1.302,1.228 -1.301,1.235 -1.3,1.243 -1.3,1.25 -1.3,1.257 -1.301,1.265 -1.302,1.272 -1.303,1.279 -1.305,1.286 -1.307,1.293 -1.309,1.3 -1.312,1.307 -1.315,1.314 -1.319,1.32 -1.323,1.326 -1.327,1.332 -1.331,1.338 -1.336,1.344 -1.341,1.349 -1.346,1.354 -1.352,1.359 -1.358,1.363 -1.364,1.367 -1.37,1.371 -1.376,1.375 -1.383,1.378 -1.39,1.381 -1.397,1.383 -1.404,1.385 -1.411,1.387 -1.418,1.388 -1.425,1.389 -1.433,1.39 -1.44,1.39 -2.15,1.39
  Top Layer region: -2.15,1.61 -1.44,1.61 -1.433,1.61 -1.425,1.611 -1.418,1.612 -1.411,1.613 -1.404,1.615 -1.397,1.617 -1.39,1.619 -1.383,1.622 -1.376,1.625 -1.37,1.629 -1.364,1.633 -1.358,1.637 -1.352,1.641 -1.346,1.646 -1.341,1.651 -1.336,1.656 -1.331,1.662 -1.327,1.668 -1.323,1.674 -1.319,1.68 -1.315,1.686 -1.312,1.693 -1.309,1.7 -1.307,1.707 -1.305,1.714 -1.303,1.721 -1.302,1.728 -1.301,1.735 -1.3,1.743 -1.3,1.75 -1.3,1.757 -1.301,1.765 -1.302,1.772 -1.303,1.779 -1.305,1.786 -1.307,1.793 -1.309,1.8 -1.312,1.807 -1.315,1.814 -1.319,1.82 -1.323,1.826 -1.327,1.832 -1.331,1.838 -1.336,1.844 -1.341,1.849 -1.346,1.854 -1.352,1.859 -1.358,1.863 -1.364,1.867 -1.37,1.871 -1.376,1.875 -1.383,1.878 -1.39,1.881 -1.397,1.883 -1.404,1.885 -1.411,1.887 -1.418,1.888 -1.425,1.889 -1.433,1.89 -1.44,1.89 -2.15,1.89
  silkscreen extent -3.1,-2.3 1.8,2.3
*SOT65P210X110-5N [mil]
  rect 46x14 smd: 1(-41,26) 2(-41,0) 3(-41,-26) 4(41,-26) 5(41,26)
  silkscreen extent -5,30 5,31
*XTALDFN200X160X70-4N [mm]
  rect 0.67x0.63 smd: 1(-0.65,-0.45) 2(0.65,-0.45) 3(0.65,0.45) 4(-0.65,0.45)
  silkscreen extent -1.66,-0.95 1.17,0.95
CUI_SJ-43515TS [mm]
  rect 1.65x1.65 hole 1.1: 1(-2.6,4.8)
  round 1.65 hole 1.1: 2(2.4,-3.6) 3(5.5,1.6) 4(-2.6,-4.5) 5(5.5,-1.6)
  round 1.1 hole 1.1 unplated: ""(-2.6,0) ""(2.4,0)
  silkscreen extent -5.5,-4.3 5.5,5.7
HDR1X2 [mm] "Connector; Header; 2 Position"
  rect 1.5x1.5 hole 0.9: 1(0,0)
  round 1.5 hole 0.9: 2(2.54,0)
  silkscreen extent -1.27,-1.27 3.81,1.27
HEADER-1X2 [mil]
  rect 70x70 hole 40: 1(0,0)
  round 70 hole 40: 2(0,-100)
  silkscreen extent -50,-150 50,50, body extent -50,-150 50,50, height 470
HEADER-2X5 [mil]
  rect 70x70 hole 40: 1(0,0) 2(100,0)
  round 70 hole 40: 3(0,-100) 4(100,-100) 5(0,-200) 6(100,-200) 7(0,-300) 8(100,-300) 9(0,-400) 10(100,-400)
  silkscreen extent -50,-450 150,50, body extent -50,-450 150,50, height 470
QFN16 [mm] "QFN, 16-Leads, Body 4,00x4,00mm, Pitch 0,65mm, Thermal Pad 2,16x2,16mm, IPC Medium Density"
  oval 1.1x0.35 smd: 1(-1.825,0.975) 2(-1.825,0.325) 3(-1.825,-0.325) 4(-1.825,-0.975) 9(1.825,-0.975) 10(1.825,-0.325) 11(1.825,0.325) 12(1.825,0.975)
  oval 0.35x1.1 smd: 5(-0.975,-1.825) 6(-0.325,-1.825) 7(0.325,-1.825) 8(0.975,-1.825) 13(0.975,1.825) 14(0.325,1.825) 15(-0.325,1.825) 16(-0.975,1.825)
  rect 2.16x2.16 smd: 17(0,0)
  silkscreen extent -3,-2.22 2.23,2.22, body extent -2.07,-2.07 2.07,2.07, height 1
QFN32 [mm] "QFN, 32-Leads, Body 5,00x5,00mm, Pitch 0,50mm, Thermal Pad 3,45x3,45mm, IPC Medium Density"
  oval 0.95x0.25 smd: 1(-2.375,1.75) 2(-2.375,1.25) 3(-2.375,0.75) 4(-2.375,0.25) 5(-2.375,-0.25) 6(-2.375,-0.75) 7(-2.375,-1.25) 8(-2.375,-1.75) 17(2.375,-1.75) 18(2.375,-1.25) 19(2.375,-0.75) 20(2.375,-0.25) 21(2.375,0.25) 22(2.375,0.75) 23(2.375,1.25) 24(2.375,1.75)
  oval 0.25x0.95 smd: 9(-1.75,-2.375) 10(-1.25,-2.375) 11(-0.75,-2.375) 12(-0.25,-2.375) 13(0.25,-2.375) 14(0.75,-2.375) 15(1.25,-2.375) 16(1.75,-2.375) 25(1.75,2.375) 26(1.25,2.375) 27(0.75,2.375) 28(0.25,2.375) 29(-0.25,2.375) 30(-0.75,2.375) 31(-1.25,2.375) 32(-1.75,2.375)
  rect 3.45x3.45 smd: 33(0,0)
  silkscreen extent -3.47,-2.7 2.7,2.7, body extent -2.55,-2.55 2.55,2.55, height 1
QFN40 [mm] "QFN, 40-Leads, Body 6,00x6,00mm, Pitch 0,50mm, Thermal Pad 4,50x4,50mm, IPC Medium Density"
  oval 0.95x0.25 smd: 1(-2.9,2.25) 2(-2.9,1.75) 3(-2.9,1.25) 4(-2.9,0.75) 5(-2.9,0.25) 6(-2.9,-0.25) 7(-2.9,-0.75) 8(-2.9,-1.25) 9(-2.9,-1.75) 10(-2.9,-2.25) 21(2.9,-2.25) 22(2.9,-1.75) 23(2.9,-1.25) 24(2.9,-0.75) 25(2.9,-0.25) 26(2.9,0.25) 27(2.9,0.75) 28(2.9,1.25) 29(2.9,1.75) 30(2.9,2.25)
  oval 0.25x0.95 smd: 11(-2.25,-2.9) 12(-1.75,-2.9) 13(-1.25,-2.9) 14(-0.75,-2.9) 15(-0.25,-2.9) 16(0.25,-2.9) 17(0.75,-2.9) 18(1.25,-2.9) 19(1.75,-2.9) 20(2.25,-2.9) 31(2.25,2.9) 32(1.75,2.9) 33(1.25,2.9) 34(0.75,2.9) 35(0.25,2.9) 36(-0.25,2.9) 37(-0.75,2.9) 38(-1.25,2.9) 39(-1.75,2.9) 40(-2.25,2.9)
  rect 4.5x4.5 smd: 41(0,0)
  silkscreen extent -4,-3.22 3.22,3.22, body extent -3.08,-3.08 3.08,3.08, height 1
"Tactile Button" [mil]
  rect 55x83 smd: 1(177.17,358.27) 2(177.17,0) 3(0,358.27) 4(0,0)
  silkscreen extent -39,59 217,295
USB-MINI-B-51387-0571 [mil] "MOLEX 51387-0571"
  oval 70x20 smd: 1(0,0) 2(1,-30) 3(1,-61.99) 4(1,-93) 5(1,-124.98)
  oval 100x60 hole 30 slot 60 at 0 deg: M1(-134.82,-206.68) M2(-134.82,82.69) M3(-19,-206) M4(-18,83)
  silkscreen extent -263,-206 -2,84, body extent -263,-214 1,90, height 166

## Part data
+ -: library part "Header 2", "Header, 2-Pin", LatestRevisionDate=17-Jul-2002, LatestRevisionNote="Re-released for DXP Platform.", Publisher="Altium Limited"
C1 C5 C6 C7 C10 C12 C15 C16 C17 C18 C19 C20 C21 C22 C23 C24 C25 C26 C27 C28 C29 C30 C31 C32 C33 C34 C35 C36 C37 C38 C39: library part 0402C-TBD, "CAPACITOR 0402 CERAMIC"
C2 C3 C4: library part 0603C-000, "CAPACITOR 0603 CERAMIC"
C8 C9: library part 1206C-2U2-50V, "CAPACITOR 0603 CERAMIC", Supplier Part Number 1=490-4796-2-ND, REEL=C100, Supplier 1=Digi-Key
C11 C13 C14: library part 0603C-10UF-10V-X5R-TDK, "CAPACITOR 0603 CERAMIC", Manufacturer="TDK Corporation", Manufacturer Part Number=C1608X5R0J106M, Supplier Part Number 1=445-4112-2-ND, REEL=C31, Supplier 1=Digi-Key
Charging: library part USB-MINI-B-MOLEX-51387-0571, "MINI USB B DEVICE CONNECTOR MOLEX 51387-0571", Supplier Part Number 1=WM5462DKR-ND, Supplier 1=Digi-Key
D1 D3: "Typical RED, GREEN, YELLOW, AMBER GaAs LED", LatestRevisionDate=17-Jul-2002, LatestRevisionNote="Re-released for DXP Platform.", PackageDescription="SM LED; 2 Flat Leads", PackageReference=3.2X1.6X1.1, PackageVersion=Feb-2002, Published=8-Jun-2000, Publisher="Altium Limited"
D2: "GENERIC DIODE"
I2C: library part HEADER-1X2, Supplier Part Number 1=S1011E-36-ND, REEL=TH, Supplier 1=Digi-Key
Input Output: library part SJ1-42515TS, "3.5 mm, 4 Conductors, Right Angle, Through Hole, Audio Jack Connector", Package=None, Availability=Unavailable, CUI_purchase_URL=https://www.cuidevices.com/product/interconnect/connectors/audio-connectors/jacks/sj1-4251x-series?utm_source=snapeda.com&utm_medium=referral&utm_campaign=snapedaBOM, MF="CUI Devices", MP=SJ1-42515TS, Price=None, SnapEDA_Link=https://www.snapeda.com/parts/SJ1-42515TS/CUI%20Devices/view-part/1320737/?ref=snap
ON/PAIR VOL+ VOL-: "Tactile Button"
Programmer: library part HEADER-2X5
R1 R2 R3 R4 R5 R6 R7 R8 R9 R10 R11 R12 R13 R14 R15 R16 R17 R18 R19 R20 R21: library part 0402R-GENERIC, "RESISTOR 0402 GENERIC"
U1: "2.4 GHz RF SoC FOR WIRELESS DIGITAL AUDIO STREAMING CC8520, CC8521, CC8530 & CC8531 - PurePath™ Wireless"
U2: "2.4-GHzRFFrontEnd,14-dBmoutputpower"
U3: "SINGLE-CHIPCHARGERANDDC/DCCONVERTERICFORPORTABLEAPPLICATIONS"
U4: "Single 2-Input Positive-OR Gate 5-SC70 -40 to 125", Package="SC-70-5 Texas Instruments", Digi-Key_Part_Number=296-8749-1-ND, Digi-Key_Purchase_URL=https://www.digikey.com/product-detail/en/texas-instruments/SN74AHC1G32DCKR/296-8749-1-ND/373812?utm_source=snapeda&utm_medium=aggregator&utm_campaign=symbol, MF="Texas Instruments", MP=SN74AHC1G32DCKR, SnapEDA_Link=https://www.snapeda.com/parts/SN74AHC1G32DCKR/Texas%20Instruments/view-part/429264/?ref=snap
U5: "The TLV320AIC3204(alsocalledthe AIC3204)is aflexible,low-power,low-voltagestereoaudiocodecwithprogrammableinputsand outputs,PowerTunecapabilities,fixedpredefinedandparameterizablesignal-processingblocks,integratedPLL,integratedLDOsand flexibledigitalinterfaces."
L1 L2 L3 L11 L12 L13: Code_IEC=1005, Code_JEITA=0402, LatestRevisionDate=29-May-2009, LatestRevisionNote="IPC-7351 Footprint Added.", PackageDescription="Chip Inductor", PackageReference=0402-A, Published=8-Jun-2000, Publisher="Altium Limited"

## Via types
v1: diameter 19.68, hole 9.84, Top Layer to Bottom Layer, tented both sides, 70 vias
v2: diameter 19.68, hole 9.84, Top Layer to Bottom Layer, 29 vias

## Nets (pads, with @x,y where several pads share a name; then routed paths per layer and width w, separated by ;. In a path a pad name is that pad's centre, name@x,y a point inside that pad or via, vN(x,y) a via of type N, cw(c..) or ccw(c..) an arc to the next point about the centre after c; other vN are vias at no path point)
AVDD_A: C6.1 C10.1 C11.1 C17.2 C18.1 C31.1 C32.1 C33.1 L1.2 L2.2 L3.2 Programmer.2 R1.2 R5.1 R15.1 R16.1 R17.1 U1.10 U1.12 U1.18 U1.37 U1.40 U5.6 U5.26 | length 4424.4
  Top Layer w8: C11.1 2104,2938 L1.2 ; C32.1 2645.76,3018.07 U1.40 ; v1(2699,3077) 2699.13,3077.13 U1.37 ; C18.1 2916.76,2865.07 v1@2940.65,2865.07 ; v1(2941,2865.07) 2951.07,2855 2964.93,2855 U1.10 ; C31.1 2976,2854 R16.1 ; U1.12 3135.24,3037.76 C33.1 3141.35,3036.97 L2.2 v1@3222.69,3035 ; U1.18 3055.87,3155.87 v1(3056,3156) ; v1(3056,3359) L3.2 ; R15.1 R16.1 ; v1(3223,3035.31) v1@3222.69,3035 ; C17.2 C17.2@3346,2953 ; U5.6 3346,2817.03 3346,2878 ; v1(3375,2966) 3359,2966 C17.2@3346,2953 ; U5.26 v1(3523.69,2673.69) ; v1(3658,2808) 3658,2833.6 C6.1 ; R1.2 v1@3658.4,2808 ; v1@3658.4,2810 C6.1 ; R16.1 3162.4,2878 3346,2878 ; v1@3222.69,3035 3260.69,2997 3405,2997 v1(3435,2967) 3525.4,2967 C6.1 ; 3346,2878 C17.2@3346,2953
  Top Layer w12: L1.2 2199,2953 C10.1 v1(2309,2926) R5.1 ; v1@2621.35,2926 C32.1
  Bottom Layer w8: 2479,2926 2480,2927 R17.1 ; v1(2699,3077) v1(2699,3018) 2699,2896 2729.93,2865.07 v1(2941,2865.07) ; v1(3056,3359) v1(3056,3156) 3196,3156 3223,3129 v1(3223,3035.31) ; v1(3375,2966) 3430,2966 3431,2967 v1(3435,2967) ; v1(3523.69,2673.69) v1(3658,2808)
  Bottom Layer w12: v1(2309,2926) 2479,2926 v1(2622,2926) 2622,2868 Programmer.2
AVDD_CC2590: C16.1 C21.1 C22.1 C25.1 C26.1 C27.1 C28.1 C29.1 L3.1 U2.1 U2.7 U2.10 U2.13 U2.16 | length 1477.9
  Top Layer w8: v1(2738,3556) C27.1 2824.53,3583.31 U2.13 ; C22.1 C21.1 ; U2.16 2767.92,3504.92 C28.1 2738.32,3474.69 v1(2738.32,3436.68) 2746.32,3436.68 C21.1 ; U2.1 2859.61,3399.92 C21.1 ; U2.10 2910.8,3652.8 2941.31,3683.31 C29.1 2993,3680 C16.1 C25.1@3056.35,3556.65 ; U2.7 3055.79,3556.1 C25.1@3056.35,3556.65 ; v1(3027.68,3436.68) L3.1 3058,3438.68 C26.1 3056.35,3504.96 C25.1@3056.35,3556.65 ; C25.1 C25.1@3056.35,3556.65
  Bottom Layer w8: v1(2738,3556) 2738,3437 v1(2738.32,3436.68) v1(3027.68,3436.68)
AVDD_R: C15.1 C20.1 C23.2 C24.2 C30.1 C34.1 L2.1 U1.20 U1.23 U1.26 U1.27 U1.28 U1.31 | length 1171.9
  Top Layer w8: C15.1 C24.2 C30.1 2622.76,3195.24 U1.31 ; v1(2671,3279) 2795,3279 2827.13,3246.87 U1.28 U1.27 U1.26 v1(2866.5,3264.5) ; U1.23 v1(2925.56,3265.56) ; U1.20 3109.93,3195.24 C20.1 C34.1 C23.2 3141.35,3076.97 L2.1
  Bottom Layer w8: v1(2621,3280) 2670,3280 v1(2671,3279) ; v1(2866.5,3264.5) 2924.5,3264.5 v1(2925.56,3265.56) 3025.44,3265.56 3033,3258 v1(3033,3195.24)
GND: -.1 -.2 C2.2 C3.2 C4.2 C5.2 C6.2 C11.2 C12.2 C13.2 C14.2 C15.2 C16.2 C17.1 C18.2 C19.1 C20.2 C21.2 C22.2 C23.1 C24.1 C25.2 C26.2 C27.2 C28.2 C29.2 C30.2 C31.2 C32.2 C33.2 C34.2 C35.2 C36.2 C38.2 C39.2 Charging.5 Charging.M1 Charging.M2 Charging.M3 Charging.M4 Input.4 L13.1 ON/PAIR.3 ON/PAIR.4 Output.4 Programmer.1 R2.1 R7.2 R11.2 R12.2 R13.2 R14.2 R18.1 R20.2 U1.41 U2.8 U2.9 U2.12 U2.14 U2.17 U3.3 U3.9 U3.21 U3.21_1 U3.21_2 U3.21_3 U3.21_4 U3.21_5 U3.21_6 U3.21_7 U3.21_8 U3.21_9 U3.21_10 U3.21_11 U3.21_12 U4.3 U5.7 U5.12 U5.17 U5.28 U5.33 VOL+.3 VOL+.4 VOL-.3 VOL-.4 X1.2 X1.4 | length 5075.3
  Top Layer w4.92: U4.3 v1(2028,2458) ; v1(3181.35,2998.65) C33.2
  Top Layer w8: C11.2 2093,2834 R12.2 2112.17,2623.83 ; C13.2 2145,2353 Charging.M4 2277.31,2220.69 Charging.M2 Charging.M1 2566.68,2216.68 2570,2220 2570,2483 2507,2546 R14.2 ; U3.3 2245.46,2563.79 U3.21 ; 2245.46,2677.96 2245.46,2662.21 U3.21 ; C14.2 2364,2823 R11.2 2438,2808 2469,2839 ; U3.9 2363.57,2561.82 2312.38,2613 U3.21 ; U3.21_3 2305.5,2623.83 U3.21 ; 2461.83,2623.83 R14.2 ; Charging.5 2546,2240 Charging.M3 ; C19.1 C32.2 2540.69,2953 C12.2 R7.2 2469,2839 ; C30.2 C24.1 C15.2 R18.1 ; C28.2 C27.2 ; C22.2 C21.2 ; U2.14 2867.49,3556.1 v2(2876.35,3564.96) 2859.61,3581.69 U2.12 ; C18.2 C31.2 ; U2.17@2916.69,3562 U2.17@2936.38,3581.69 ; U2.9 U2.17@2936.39,3581.69 ; U2.8 U2.17@2936.38,3581.69 ; C36.2 3082.47,3331.65 X1.2 3098,3332.61 C26.2 3096.35,3504.96 C16.2 3096.35,3619.96 C29.2 ; X1.4 3207.94,3288.94 3181.35,3262.35 C20.2 C34.2 C23.1 ; U5.12 3365.06,2732.74 v2(3331.59,2766.2) 3325.69,2772.11 U5.7 ; U5.17 3306,2645.25 3309.02,2648.27 3309.02,2657.02 v2(3374.9,2722.9) ; U5.33@3384.74,2713.06 U5.28 ; R2.1 3673.4,2719 C3.2 ; 2469,2839 2469,2767 R13.2 R14.2
  Bottom Layer w4.92: v2(2811.39,3085) v2(2854.69,3085) ; v2(2811.39,3128.31) v2(2854.69,3128.31) ; v2(2854.69,3041.69) v2(2854.69,3085) ; v2(2854.69,3171.61) v2(2854.69,3128.31) ; v2(2898,3041.69) v2(2898,3085) ; v2(2898,3171.61) v2(2898,3128.31) ; v2(2941.31,3085) v2(2898,3085) ; v2(2941.31,3128.31) v2(2898,3128.31) ; v2(3331.59,2722.9) v2(3374.9,2722.9) ; v2(3374.9,2679.59) v2(3374.9,2722.9) ; v2(3374.9,2766.2) v2(3374.9,2722.9) ; v2(3418.21,2722.9) v2(3374.9,2722.9) ; v2(2854.69,3085) v2(2898,3085) ; v2(2854.69,3128.31) v2(2898,3128.31) ; v2(2898,3085) v2(2898,3128.31)
  other v2: 3331.59,2679.59 3418.21,2679.59 3418.21,2766.2 2811.39,3041.69 2941.31,3041.69 2811.39,3171.61 2941.31,3171.61 2876.35,3521.65 2919.65,3521.65 2919.65,3564.96
NetC1_1: C1.1 Input.2 R4.2 | length 371.2
  Top Layer w12: R4.2 C1.1 3140,2365 3223.15,2281.85 Input.2
NetC1_2: C1.2 U5.13 | length 299.2
  Top Layer w8: C1.2 v1(3170,2530) ; v1(3213.06,2713.06) U5.13
  Bottom Layer w8: v1(3170,2530) 3170,2670 v1(3213.06,2713.06)
NetC2_1: C2.1 U5.18 | length 115.6
  Top Layer w8: C2.1 3301,2535 3325.69,2559.69 U5.18
NetC3_1: C3.1 U5.29 | length 172.3
  Top Layer w8: U5.29 3564.66,2732.74 C3.1
NetC4_1: C4.1 C5.1 U5.24 | length 318.2
  Top Layer w8: C5.1 3230,2510 3335,2510 C4.1 3395,2535 3443.8,2583.8 U5.24
NetC7_1: C7.1 U5.14 | length 103.3
  Top Layer w8: C7.1 3179.03,2693.37 U5.14
NetC7_2: C7.2 Input.3 R3.2 | length 355.9
  Top Layer w12: Input.3 3030,2450.91 3030,2527.95 3136.05,2634 R3.2 C7.2
NetC8_1: C8.1 U5.27 | length 449.6
  Top Layer w8: U5.27 3530,2693.37 3530.92,2692.45 3531.46,2692.45 3598.91,2625 3720,2625 C8.1
NetC8_2: C8.2 Output.3 | length 169.9
  Top Layer w8: Output.3 Output.3@3603.9,2403.9
  Top Layer w12: Output.3@3603.9,2403.9 C8.2
NetC9_1: C9.1 U5.25 | length 225.8
  Top Layer w8: U5.25 3510,2654 3595,2569 C9.1
NetC9_2: C9.2 Output.2 | length 478.6
  Top Layer w12: C9.2 3460,2395 3520,2335 3680,2335 3733.15,2281.85 Output.2
NetC10_2: C10.2 C12.1 R5.2 R7.1 U3.2 | length 685
  Top Layer w8: v1(2199,2543) 2220.73,2543 U3.2 ; v1(2278,2863) 2319,2863 R5.2 R7.1 C12.1 C10.2
  Bottom Layer w8: v1(2199,2543) 2199,2689 2278,2768 v1(2278,2863)
NetC13_1: C13.1 Charging.1 R6.1 R8.1 R9.1 U3.6 U4.5 | length 1078.2
  Top Layer w8: U4.5 2171,2236 v1(2171,2095)
  Top Layer w12: U4.5 2080,2354 C13.1 2144.04,2418.04 R8.1 R9.1 ; v1(2304.51,2511.49) U3.6 ; Charging.1 2359.2,2239.8 R9.1 ; v1(2408.04,2418.04) R9.1
  Bottom Layer w8: R6.1 v1(2171,2095) ; v1(2304.51,2511.49) 2365.51,2511.49 2408.04,2468.96 v1(2408.04,2418.04)
NetC14_1: +.1 +.2 C14.1 D2.1 R19.2 U3.16 U3.17 | length 1255.7
  Top Layer w8: R19.2 2024,2022 +.2@2025,2021 ; v1(2208.17,2733.83) 2284.83,2733.83 ; U3.17 2278.96,2677.96 2284.83,2683.83 ; U3.16 2284.83,2683.83 ; 2284.83,2697 2284.83,2683.83 ; 2284.83,2697.64 2284.83,2733.83 ; C14.1 2284.83,2733.83
  Top Layer w12: +.1 2036,2127 2060,2151 2060,2265 2037,2288 2017,2288 1992.35,2312.65 1992.35,2648.35 D2.1 v1(2027,2732)
  Bottom Layer w8: v1(2027,2732) 2036,2732 2037.83,2733.83 v1(2208.17,2733.83)
NetC19_2: C19.2 U1.39 | length 145.3
  Top Layer w8: C19.2 2636.35,3048.65 2647.24,3037.76 U1.39
NetC35_1: C35.1 U1.21 X1.1 | length 325.3
  Top Layer w8: U1.21 3082.83,3220.83 3115,3253 3115,3312 3127.37,3324.37 X1.1 3147.57,3331 C35.1
NetC36_1: C36.1 U1.22 X1.3 | length 189.9
  Top Layer w8: U1.22 2945.24,3246.24 2955,3256 2990.69,3256 C36.1 3029.06,3288.94 X1.3
NetC37_1: C37.1 L12.2 | length 50
  Top Layer w8: L12.2 C37.1
NetC37_2: C37.2 C39.1 L13.2 | length 192.8
  Top Layer w8: C37.2 2885,4085.31 2885,4188.15
NetC38_1: C38.1 L11.2 L12.1 | length 95.9
  Top Layer w8: L11.2 C38.1 L12.1
NetD1_1: D1.1 R6.2 | length 55
  Bottom Layer w8: D1.1 R6.2
NetD1_2: D1.2 R8.2 U3.7 U4.2 | length 864.9
  Top Layer w8: v1(2053,2362) 2053,2408 U4.2 2054,2445 2067.04,2458.04 R8.2 2304.2,2479.2 2324,2499 2324,2543 2324.2,2543.2 U3.7
  Bottom Layer w8: v1(2053,2362) 2053,2354 2192.42,2214.58 2192.42,2022.42 D1.2
NetD2_K: D2.2 R10.2 | length 92
  Top Layer w8: R10.2 D2.2
NetD3_1: D3.1 R17.2 | length 60
  Bottom Layer w8: R17.2 D3.1
NetD3_2: D3.2 U1.34 | length 146
  Top Layer w8: v1(2656,3128) 2664.18,3136.18 U1.34
  Bottom Layer w8: D3.2 2621,3128 v1(2656,3128)
NetJ1_5: Input.5 U5.8 | length 589.9
  Top Layer w12: v1(3240,2835) 3255,2835 3273.6,2816.4 U5.8
  Bottom Layer w12: Input.5 3140,2466.89 3140,2765 3210,2835 v1(3240,2835)
NetL1_1: L1.1 U3.19 | length 138.3
  Top Layer w10: L1.1 2184,2717 2221,2680
NetL11_1: L11.1 U2.11 | length 115.5
  Top Layer w8: L11.1 2885.2,3730.42 U2.11
NetON/PAIR_1: ON/PAIR.1 ON/PAIR.2 U1.9 | length 1705.9
  Top Layer w8: v1(2945.24,2951.24) U1.9 ; v1(3029.24,2951.24) 3216.24,2951.24 v1(3244,2979)
  Bottom Layer w8: v1(2945.24,2951.24) v1(3029.24,2951.24) ; v1(3244,2979) 3244,3780 ON/PAIR.1 ON/PAIR.2
NetP2_1: I2C.1 R16.2 U1.32 U5.9 | length 1502.9
  Top Layer w8: I2C.1@2381,3198 2403.45,3175.55 v1(2677,3175.55) U1.32 ; v1(2950,2749) v1(3227,2749) ; R16.2 3178.4,2844.6 3231.2,2791.8 U5.9
  Bottom Layer w8: v1(2677,3175.55) 2677,3105.27 2667.31,3095.59 2667.31,2873.69 2792,2749 v1(2950,2749) ; v1(3221,2804) 3227,2804 v1(3227,2749)
NetP2_2: I2C.2 R15.2 U1.33 U5.10 | length 1350.8
  Top Layer w8: I2C.2@2381,3098 2438.87,3155.87 v1(2697,3155.87) U1.33 ; v1(2979,2768) 3147.52,2768 3173.52,2794 R15.2 3200.29,2772.11 U5.10
  Bottom Layer w8: v1(2697,3155.87) 2697,3107 2680.24,3090.24 2680.24,2887.76 2800,2768 v1(2979,2768)
NetP4_5: Programmer.5 U1.3 | length 556.6
  Top Layer w8: Programmer.5 2756.08,2546.08 2756.08,2728.7 2827.13,2799.75 U1.3 U1.3@2826.08,2991.42
NetP4_6: Programmer.6 U1.4 | length 526.7
  Top Layer w8: Programmer.6 2852.66,2542.66 2852.66,2986.64 U1.4
NetP4_7: Programmer.7 U1.11 | length 861.4
  Top Layer w8: U1.11 2990.52,2917.48 v1(3018,2890)
  Bottom Layer w8: Programmer.7 2750,2440 2904,2440 3018,2554 v1(3018,2890)
NetP4_8: Programmer.8 U1.5 | length 630
  Top Layer w8: Programmer.8 2866.5,2456.5 U1.5
NetP4_10: Programmer.10 U1.6 | length 738.2
  Top Layer w8: Programmer.10 2886.19,2376.19 U1.6
NetR1_1: R1.1 R2.2 U5.30 | length 203.7
  Top Layer w8: U5.30 3609.43,2752.43 3618.4,2761.4 ; R2.2 3618.4,2761.4 ; R1.1 3618.4,2761.4
NetR3_1: R3.1 R4.1 U5.19 | length 410.5
  Top Layer w4.92: U5.19 3345.37,2581.63 v1(3346,2581)
  Top Layer w8: R4.1 3108.4,2568.4 3148.4,2568.4 3178.4,2598.4 R3.1 v1(3214,2634)
  Bottom Layer w8: v1(3214,2634) 3267,2581 v1(3346,2581)
NetR9_2: R9.2 U3.8 U4.1 | length 455.5
  Top Layer w8: U4.1 v1(2107,2436) ; U3.8 2343.88,2473.35 R9.2 2386.96,2458.04 v1(2389,2456)
  Bottom Layer w8: v1(2107,2436) 2369,2436 v1(2389,2456)
NetR10_1: R10.1 U3.4 U4.4 | length 470.6
  Top Layer w8: U4.4 2007.27,2347.73 2007.27,2476.27 R10.1 2256,2496 2265.14,2505.14 U3.4
NetR11_1: R11.1 U3.15 | length 130.3
  Top Layer w8: U3.15 2304.51,2709.51 2363,2768 R11.1
NetR12_1: R12.1 U3.20 | length 77.2
  Top Layer w8: R12.1 2133.47,2642.53 U3.20
NetR13_1: R13.1 U3.13 | length 156.5
  Top Layer w8: U3.13 2343.88,2698.88 2374,2729 R13.1
NetR14_1: R14.1 U3.12 | length 107.1
  Top Layer w8: U3.12 2458.04,2677.96 R14.1
NetR18_2: R18.2 U1.30 | length 285.7
  Top Layer w8: R18.2 2649,3334 2649,3230 2658.17,3220.83 U1.30
NetR19_1: R19.1 U1.29 | length 1670.5
  Top Layer w8: R19.1 1977.43,2300.57 1977.43,2909.43 2320,3252 2540,3252 v1(2542,3250) ; v1(2670,3250) 2797,3250 2807.45,3239.55 U1.29
  Bottom Layer w8: v1(2542,3250) v1(2670,3250)
NetR20_1: R20.1 U2.15 | length 89.1
  Top Layer w8: R20.1 2823.95,3528.31 U2.15
NetR21_1: R21.1 U1.24 U2.4 | length 263.3
  Top Layer w8: U1.24 2905.87,3317.87 2926.35,3338.35 R21.1 2936.39,3371.69 U2.4
NetR21_2: R21.2 U1.25 U2.2 | length 251.2
  Top Layer w8: U2.2 2886.35,3470.31 R21.2 2886.35,3220.98 U1.25
NetU1_7: U1.7 VOL+.1 VOL+.2 | length 1720.1
  Top Layer w8: v1(2694,3336) 2695,3337 v1(2761,3337) ; v1(2905.87,2903.13) U1.7
  Bottom Layer w8: VOL+.1 VOL+.2 2568.27,3461.73 v1(2694,3336) ; v1(2761,3337) 2761,2925 2758,2922 2776.87,2903.13 v1(2905.87,2903.13)
NetU1_8: U1.8 U5.31 | length 844.9
  Top Layer w6: U1.8 2926,2992.04 v1(2926,2927) ; v1(3051,2927) 3225,2927 3282,2984 3385,2984 3508,2861 3508,2782 3498.11,2772.11 U5.31
  Bottom Layer w6: v1(2926,2927) v1(3051,2927)
NetU1_13: U1.13 U5.1 | length 613.3
  Top Layer w8: U1.13 v1(3030.44,3057.44) ; v1(3443,2854) 3443.8,2853.2 U5.1
  Bottom Layer w8: v1(3030.44,3057.44) 3030.44,2991.56 3168,2854 v1(3443,2854)
NetU1_14: U1.14 U5.2 | length 633
  Top Layer w8: U1.14 v1@3046.13,3077.13 ; v1(3049,3076) 3047.25,3076 v1@3046.13,3077.13 ; v1@3054,3073 v1@3049.87,3077.13 ; U5.2 v1(3424.11,2874.11) ; v1@3046.13,3077.13 v1@3049.87,3077.13 ; v1@3046.13,3077.13 3048,3079 v1@3049.87,3077.13
  Bottom Layer w8: v1@3049,3071.42 v1(3049,3076) ; v1@3049.2,3071.42 3049.2,3002.8 3177.89,2874.11 v1(3424.11,2874.11)
NetU1_15: U1.15 U5.3 | length 630.8
  Top Layer w8: U1.15 v1(3068.81,3096.81) ; v1(3404,2893) 3404,2896.15 3404.43,2896.57 U5.3
  Bottom Layer w8: v1(3068.81,3096.81) 3068.81,3013.19 3189,2893 v1(3404,2893)
NetU1_16: U1.16 U5.5 | length 613.4
  Top Layer w8: U1.16 3088.5,3116.5 v1(3088.99,3116) ; v1(3365,2914) 3365,2816.46 U5.5
  Bottom Layer w8: v1(3088.99,3116) 3088.99,3018.01 3193,2914 v1(3365,2914)
NetU1_17: U1.17 U5.4 | length 660.4
  Top Layer w8: U1.17 v1(3108.18,3136.18) ; v1(3384,2936) 3384,2817.14 U5.4
  Bottom Layer w8: v1(3108.18,3136.18) 3108.18,3026.82 3199,2936 v1(3384,2936)
NetU1_19: U1.19 VOL-.1 VOL-.2 | length 1224.3
  Top Layer w8: U1.19 v1(3082.45,3175.55) v1@3082.55,3175.55
  Bottom Layer w8: VOL-.1 VOL-.2 3156.27,3249.37 v1(3082.45,3175.55)
NetU1_35: U1.35
NetU1_36: U1.36 U2.5 | length 671.6
  Top Layer w8: v1(2722,3096) 2761.36,3096 U1.36 ; v1(2959,3415) 2969.85,3425.85 U2.5
  Bottom Layer w8: v1(2722,3096) 2722,3382 2755,3415 v1(2959,3415)
NetU1_38: U1.38 U2.6 | length 799.5
  Top Layer w8: v1(2722.44,3057.44) U1.38 ; U2.6 3000.01,3530.51 3008.92,3521.61 3008.92,3412.92 v1(2991,3395)
  Bottom Layer w8: v1(2722.44,3057.44) 2742,3077 2742,3375 2762,3395 v1(2991,3395)
pads on no net: Charging.2 Charging.3 Charging.4 Input. Input.1 Output. Output.1 Output.5 Programmer.3 Programmer.4 Programmer.9 U1.1 U1.2 U2.3 U5.11 U5.15 U5.16 U5.20 U5.21 U5.22 U5.23 U5.32

## Polygon pours and split planes (outlines as drawn)
GND on Top Layer "Top Layer-No Net" (solid, pour order 61): 1968.5,1968.5 1968.5,4379.92 3937.01,4379.92 3937.01,1968.5
NetC37_2 on Top Layer "Top Layer-NetC37_2" (solid, pour order 52): 2893.7,4177.17 2874.02,4177.17 2874.02,4350.39 2783.46,4350.39 2783.46,4370.08 2980.32,4370.08 2980.32,4265.75 3086.61,4265.75 3086.61,4370.08 3192.91,4370.08 3192.91,4265.75 3299.21,4265.75 3299.21,4370.08 3405.51,4370.08 3405.51,4194.88 3385.83,4194.88 3385.83,4350.39 3318.9,4350.39 3318.9,4246.06 3173.23,4246.06 3173.23,4350.39 3106.3,4350.39 3106.3,4246.06 2960.63,4246.06 2960.63,4350.39 2893.7,4350.39
NetC37_2 on Top Layer "Top Layer-NetC37_2 1" (solid, pour order 48): 2783.46,4350.39 2818.9,4350.39 2818.9,4178.15 2783.46,4178.15
GND on Bottom Layer "Top Layer-No Net1" (solid, pour order 62): 1968.5,1968.5 1968.5,4379.92 3937.01,4379.92 3937.01,1968.5

## Other copper
Top Layer:
  pour cut-out: 2874.02,4350.39 2818.9,4350.39 2818.9,4173.23 2870.08,4173.23 2874.02,4177.17
  pour cut-out: 2763.95,4380.09 3417.49,4380.09 3417.49,4175.37 3415.35,4173.23 2893.7,4173.23 2893.7,4350.39 2960.63,4350.39 2960.63,4244.09 3106.3,4244.09 3106.3,4350.39 3173.23,4350.39 3173.23,4244.09 3318.9,4244.09 3318.9,4350.39 3385.83,4350.39 3385.83,4192.91 3405.51,4192.91 3405.51,4370.08 3299.21,4370.08 3299.21,4267.72 3192.91,4267.72 3192.91,4370.08 3086.61,4370.08 3086.61,4267.72 2980.32,4267.72 2980.32,4370.08 2783.46,4370.08 2783.46,4175.2 2781.33,4175.37 2763.95,4175.37
  pour cut-out: 2862.2,4177.17 2905.51,4177.17 2905.51,3644.64 2862.2,3644.64
Bottom Layer:
  pour cut-out: 2763.95,4175.37 3417.49,4175.37 3417.49,4380.09 2763.95,4380.09
  pour cut-out: 2763.78,4157.48

## Silkscreen, mask and mechanical layers (free items; w line width, h text height)
Top Overlay:
  text "03/05/2020" at 3914.37,4035.43 h29.53 r90
  text "IEM Reciever/Transmitter v1.1" at 3916.34,2754.76 h39.37 r90